# Altium PCB 4351 with 晶振.PcbDoc
Units mil, origin at the board's own origin, x right, y up, seen from the top; angles counter-clockwise.
Board outline 2051.03 x 1869.03 mil, 2 copper layers (Top Layer, Bottom Layer); 59 components, 33 nets, 165 pads, 212 vias.
Unrouted connection lines stored in the file: 2.
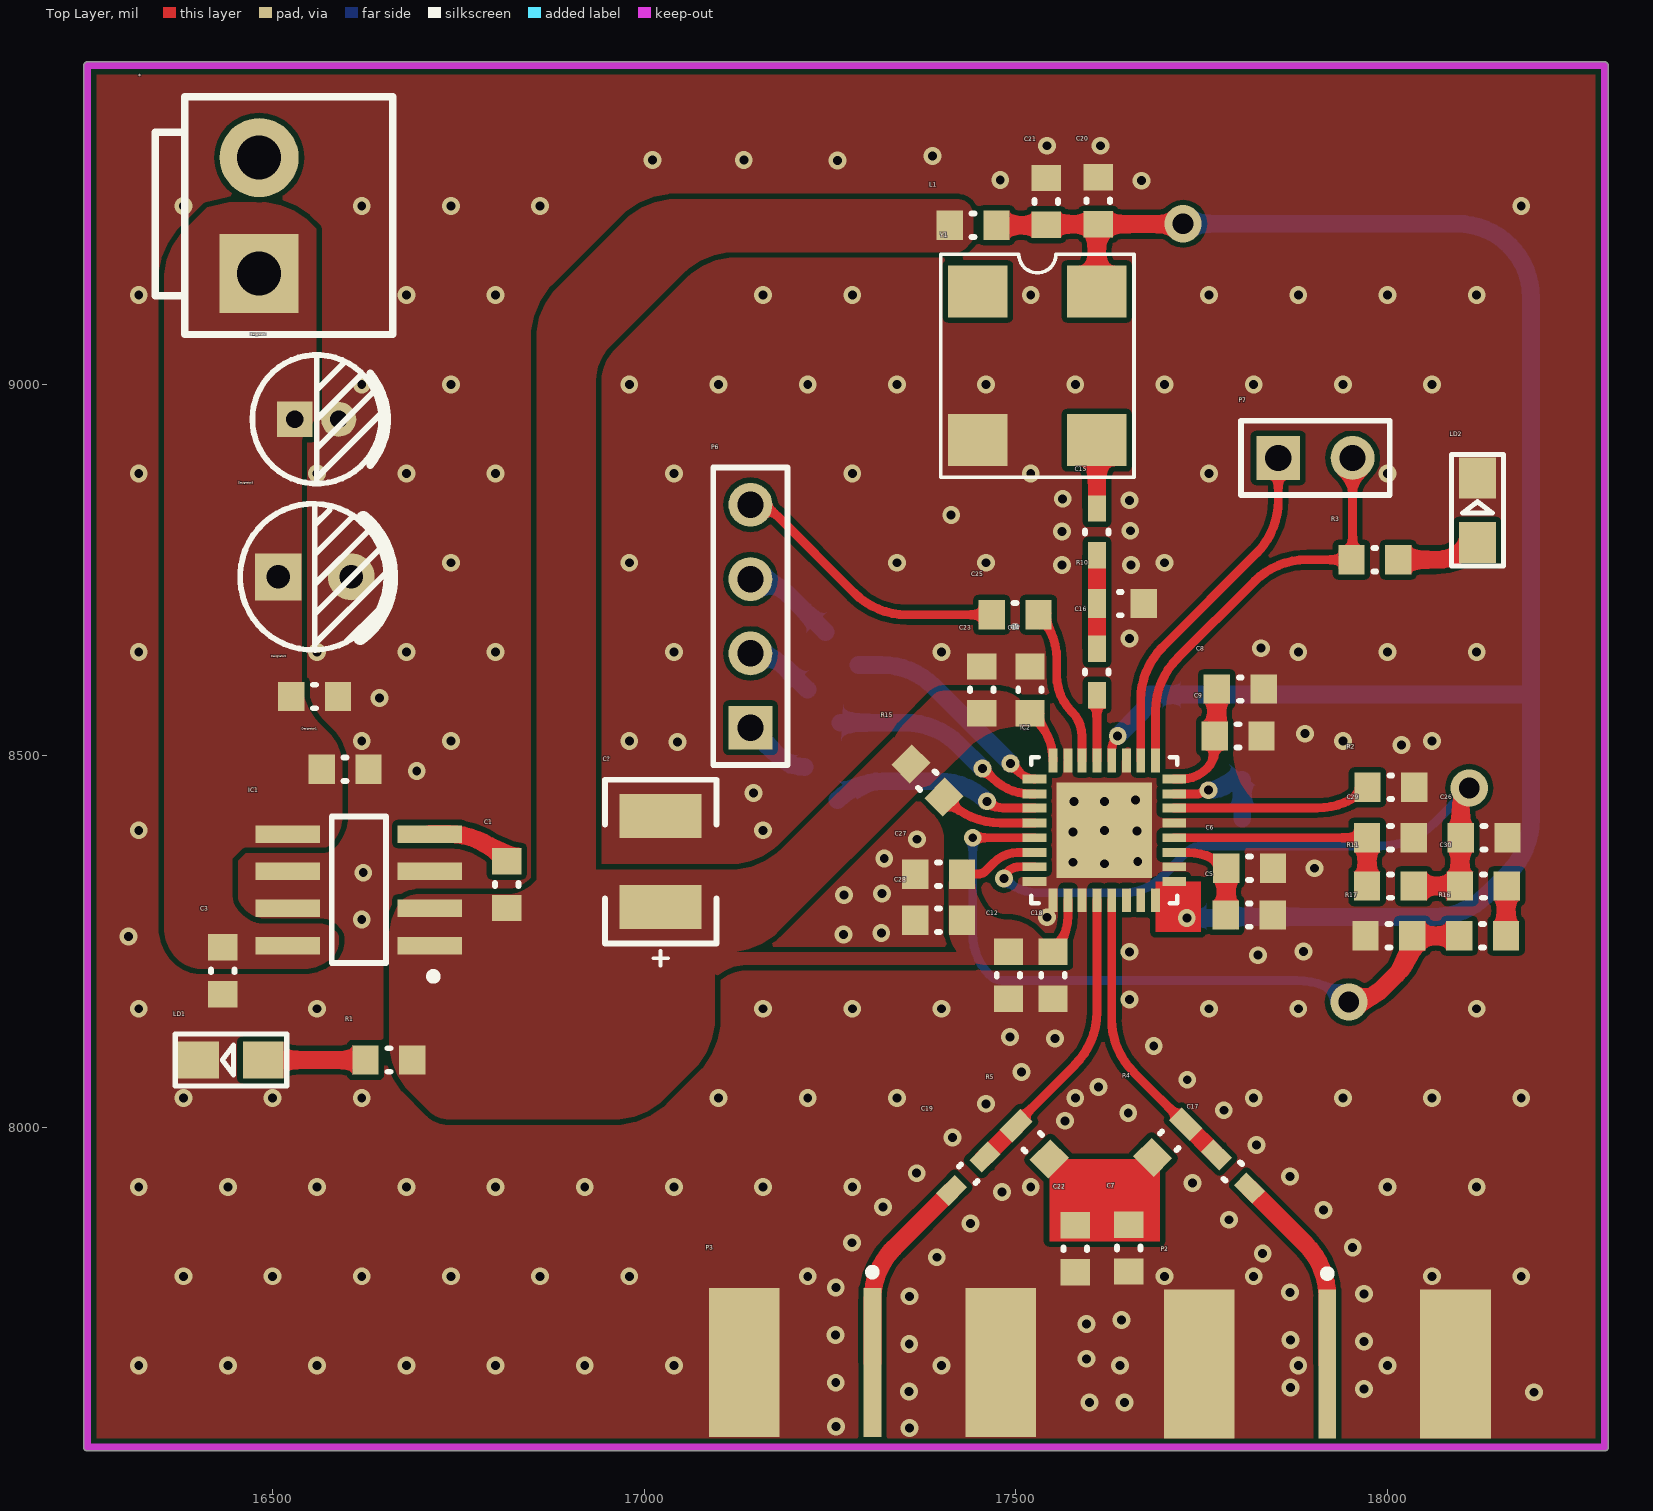
[diagram p0: Top Layer view]
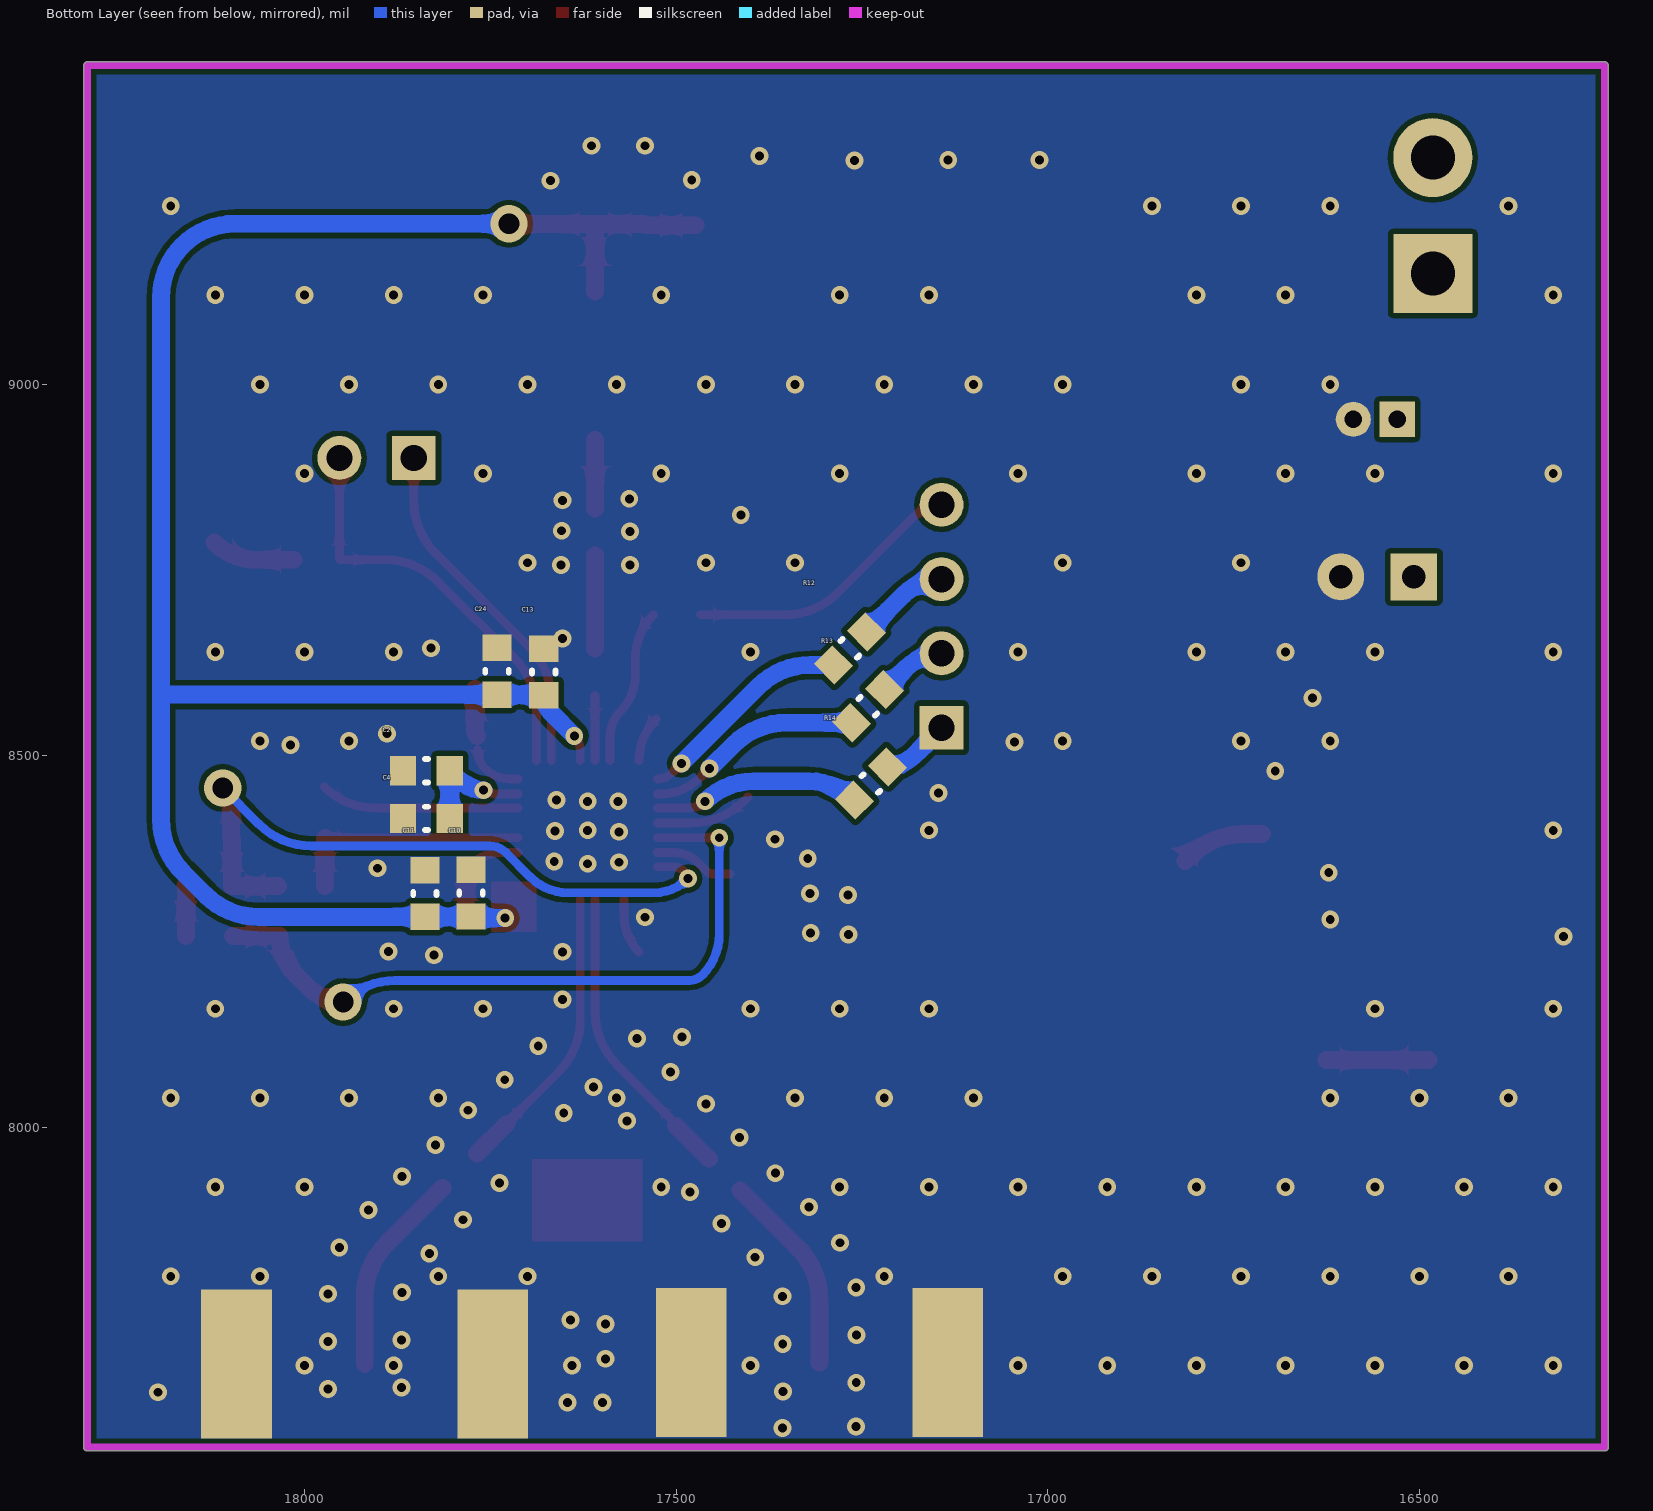
[diagram p1: Bottom Layer view, seen from below]

## Layer stack, top to bottom
Top Solder: solder mask 0.4, Solder Resist, Dk 3.5
Top Layer: signal copper 1.4
Dielectric 1: dielectric 12.6, FR-4, Dk 4.8
Bottom Layer: signal copper 1.4
Bottom Solder: solder mask 0.4, Solder Resist, Dk 3.5

## Board outline
16245.99,7570 ccw(c16251,7570) 16251,7564.98 18292,7564.98 ccw(c18292,7570) 18297.01,7570 18297.01,9429 ccw(c18292,9429) 18292,9434.01 16251,9434.01 ccw(c16251,9429) 16245.99,9429

## Design rules (kind name [scope] priority, off if disabled: settings)
Clearance [All] p1: gap=5 ignorepadtopadclearanceinfootprint=FALSE except(2: SMDPad-SMDPad; 7: Arc-Fill Arc-Poly Arc-Region Track-Fill Track-Poly Track-Region SMDPad-Fill SMDPad-Poly SMDPad-Region THPad-Fill THPad-Poly THPad-Region Via-Fill Via-Poly Via-Region Fill-Fill Fill-Poly Fill-Region Poly-Poly Poly-Region Region-Region)
PlaneConnect [All] p1: planeconnectstyle=Direct reliefexpansion=20 reliefentries=4 reliefconductorwidth=10 reliefairgap=10
PolygonConnect [All] p1: connectstyle=Direct reliefconductorwidth=10 reliefentries=4 polygonreliefangle="90 Angle" airgapwidth=10
RoutingVias [All] p1: holewidth=12 width=24 viastyle="Through Hole" minholewidth=12 minwidth=24 maxholewidth=12 maxwidth=24
SolderMaskExpansion [All] p1: expansion=4
Width [All] p1: maxlimit=24 minlimit=10 preferedwidth=12
29 further rules are at their usual default settings.

## Classes and differential pairs
component class ADF4351原理图(改): * C1 C2 C3 C4 C5 C6 C7 C8 C9 C10 C11 C12 C13 C14 C15 C16 C17 C18 C19 C20 C21 C22 C23 C24 C25 C26 C27 C28 C29 C30 C? IC1 IC2 L1 LD1 LD2 P2 P3 P6 P7 R1 R2 R3 R4 R5 R10 R11 R12 R13 R14 R15 R16 R17 Y1

## Components (designator, comment, footprint, x,y, rotation, side; value= is the part's Value field where it differs from the comment)
* "3.96" 3.96 16482,9227 r90 top
C1 "0.01uF" 0603C#1 16815,8327 r270 top
C2 "0.1uF" 0603C#1 17836,8480 r0 bottom
C3 "1uF" 0603C#1 16433,8211 r90 top
C4 "10pF" 0603C#1 17836,8416 r0 bottom
C5 "0.1uF" 0603C#1 17814,8286 r180 top
C6 "10pF" 0603C#1 17814.5,8349 r180 top
C7 "10pF" 0603C#1 17652,7838 r270 top
C8 "0.1uF" 0603C#1 17802,8590 r0 top
C9 "10pF" 0603C#1 17799,8527 r0 top
C10 "10pF" 0603C#1 17776,8315.5 r90 bottom
C11 "0.1uF" 0603C#1 17838,8315 r90 bottom
C12 "0.1uF" 0603C#1 17490,8205 r270 top
C13 "0.1uF" 0603C#1 17678,8613 r90 bottom
C14 "10pF" 0603C#1 17519,8589 r90 top
C15 "1nF" 0603C#2 17609,8801.5 r90 top
C16 "1nF" 0603C#2 17609,8613 r90 top
C17 "100pF" 0603C#2 17792,7941 r315 top
C18 "10pF" 0603C#1 17550,8205 r270 top
C19 "100pF" 0603C#2 17436,7938 r225 top
C20 "0.1uF" 0603C#1 17611,9247 r90 top
C21 "10pF" 0603C#1 17541,9246 r90 top
C22 "0.1uF" 0603C#1 17580,7837 r270 top
C23 "0.1uF" 0603C#1 17454,8589 r90 top
C24 "10pF" 0603C#1 17741,8614 r90 bottom
C25 "10pF" 0603C#1 17499,8690 r0 top
C26 "2.7nF" 0603C#1 18130,8390 r0 top
C27 "0.1uF" 0603C#1 17396,8341 r180 top
C28 "10pF" 0603C#1 17396,8279 r180 top
C29 "680pF" 0603C#1 18004,8390 r0 top
C30 "4.7nF" 0603C#1 18129,8325 r180 top
C? "10uf" TAN-B 17022,8358 r270 top value=10uF
Designator1 "Comment" 0603C#1 16597.5,8482 r0 top
Designator2 "Comment" 0603C#1 16556.5,8580 r0 top
Designator3 "Comment" "CAP 2.5*5*11 - BK" 16556.79,8741 r0 top
Designator4 "Comment" "CAP 1.5*4*8" 16559.47,8953 r0 top
IC1 "LTC1763" SOIC8_1R27_4R9X6 16616,8320 r180 top
IC2 "ADF4351" QFN50P500X500X100-33N 17619,8400 r0 top
L1 "470uH" 0603C#1 17442.5,9214 r0 top value=100uH
LD1 "LED" SMDLED 16487.54,8090.94 r180 top
LD2 "LED" SMDLED 18120.94,8786.97 r90 top
P2 "SMA" SMA 17924,7778 r90 top
P3 "SMA" SMA 17312,7780 r90 top
P6 "Header 4" HDR1X4 17143,8538 r90 top
P7 "Header 2" HDR1X2 17853,8901 r0 top
R1 "1K" 0603R#1 16656.5,8091 r0 top
R2 "4K7" 0603R#1 18004.5,8458 r0 top
R3 "1K" 0603R#1 17983,8764 r180 top
R4 "50R" 0603R#2 17706.27,7982.27 r225 top
R5 "50R" 0603R#2 17522.73,7980.27 r315 top
R10 "50R" 0603R#3 17640.5,8705 r180 top
R11 "1K" 0603R#1 18004,8325 r0 top
R12 "10K" 0603R#1 17266.27,8644.73 r315 bottom
R13 "10K" 0603R#1 17242,8567 r135 bottom
R14 "10K" 0603R#1 17238,8463 r315 bottom
R15 "10K" 0603R#1 17381,8467 r315 top
R16 "330R" 0603R#1 18128,8258 r180 top
R17 "1K" 0603R#1 18002,8258 r180 top
Y1 "" XTAL-OCX7050 17449,9125 r0 top

## Footprints (in the part's own frame and the unit in brackets; to place one, negate y for a bottom-side part, rotate by r counter-clockwise, add the part's x,y. Pads: shape width x height; smd on the part's side, far side on the other; paste and mask are expansions set on the pad)
3.96 [mm] "接插件，25V/5A"
  rect 2.7x2.7 hole 1.5: 1(-1.98,0)
  round 2.7 hole 1.5: 2(1.982,0)
  silkscreen extent -4.06,-4.57 4.07,3.56, body extent -3.98,-4.4 4.03,4.16, height 10.5
0603C#1 [mm] "Chip Capacitor, Body 1.6x0.8mm, Height 1.0mm, IPC Medium Density"
  rect 0.9x1 smd: 1(-0.8,0) 2(0.8,0)
  silkscreen extent -0.05,-0.4 0.05,0.4, body extent -0.88,-0.48 0.88,0.48, height 1
0603C#2 [mm] "Chip Capacitor, Body 1.6x0.8mm, Height 1.0mm, IPC Medium Density"
  rect 0.9x0.61 smd: 1(-0.8,0) 2(0.8,0)
  silkscreen extent -0.05,-0.4 0.05,0.4, body extent -0.87,-0.48 0.88,0.47, height 1
0603R#1 [mm] "Chip Resistor, Body 1.6x0.8mm, IPC Medium Density"
  rect 0.9x1 smd: 1(-0.8,0) 2(0.8,0)
  silkscreen extent -0.05,-0.4 0.05,0.4, body extent -0.85,-0.47 0.85,0.47, height 0.6
0603R#2 [mm] "Chip Resistor, Body 1.6x0.8mm, IPC Medium Density"
  rect 0.61x1 smd: 1(-0.8,0)
  rect 0.9x1 smd: 2(0.8,0)
  silkscreen extent -0.05,-0.4 0.05,0.4, body extent -0.85,-0.47 0.85,0.47, height 0.6
0603R#3 [mm] "Chip Resistor, Body 1.6x0.8mm, IPC Medium Density"
  rect 0.9x1 smd: 1(-0.8,0)
  rect 0.61x1 smd: 2(0.8,0)
  silkscreen extent -0.05,-0.4 0.05,0.4, body extent -0.85,-0.47 0.85,0.47, height 0.6
"CAP 1.5*4*8" [mm] "脚距1.5mm直径4mm高度8mm"
  rect 1.2x1.2 hole 0.6: 1(-0.75,0)
  round 1.2 hole 0.6: 2(0.75,0)
  silkscreen extent -2.2,-2.2 2.41,2.2, body extent -2,-2 2.02,2, height 8.04
"CAP 2.5*5*11 - BK" [mm] "脚距2.5mm直径5mm高度11mm"
  rect 1.6x1.6 hole 0.8: 1(-1.25,0)
  round 1.6 hole 0.8: 2(1.25,0)
  silkscreen extent -2.55,-2.5 2.6,2.5, body extent -2.5,-2.5 2.51,2.5, height 11.04
HDR1X2 [mm] "Connector; Header; 2 Position"
  rect 1.5x1.5 hole 0.9: 1(0,0)
  round 1.5 hole 0.9: 2(2.54,0)
  silkscreen extent -1.27,-1.27 3.81,1.27
HDR1X4 [mm] "Connector; Header; 4 Position"
  rect 1.5x1.5 hole 0.9: 1(0,0)
  round 1.5 hole 0.9: 2(2.54,0) 3(5.08,0) 4(7.62,0)
  silkscreen extent -1.27,-1.27 8.89,1.27
QFN50P500X500X100-33N [mil]
  rect 32x12 smd: 1(-94,69) 2(-94,49) 3(-94,30) 4(-94,10) 5(-94,-10) 6(-94,-30) 7(-94,-49) 8(-94,-69) 17(94,-69) 18(94,-49) 19(94,-30) 20(94,-10) 21(94,10) 22(94,30) 23(94,49) 24(94,69)
  rect 12x32 smd: 9(-69,-94) 10(-49,-94) 11(-30,-94) 12(-10,-94) 13(10,-94) 14(30,-94) 15(49,-94) 16(69,-94) 25(69,94) 26(49,94) 27(30,94) 28(10,94) 29(-10,94) 30(-30,94) 31(-49,94) 32(-69,94)
  rect 128x128 smd: 33(0,0)
  silkscreen extent -98,-98 98,98
SMA [mil]
  rect 200x24 smd: 1(-96,5)
  rect 200x95 smd: 2(-96,177.5) 2(-96,-167.5)
  rect 200x95 smd far side: 2(-96,177.5) 2(-96,-167.5)
  silkscreen extent 21,0 31,10, body extent -571,-183 -9,192, height 171
SMDLED [mm]
  rect 1.4x1.27 smd: 1(0.001,-0.002) 2(2.211,-0.002)
  silkscreen extent -0.8,-0.89 3.01,0.89
SOIC8_1R27_4R9X6 [mm] "1.2 A current limited high-side power switch with thermal shutdown"
  rect 2.2x0.6 smd: 1(-2.425,1.905) 2(-2.425,0.635) 3(-2.425,-0.635) 4(-2.425,-1.905) 5(2.425,-1.905) 6(2.425,-0.635) 7(2.425,0.635) 8(2.425,1.905)
  silkscreen extent -2.68,-2.5 0.93,3.08, body extent -2,-2.5 2,2.5, height 1.45
TAN-B [mm] "Tan Capacitor"
  rect 1.5x2.8 smd: 1(1.55,0) 2(-1.55,0)
  silkscreen extent -2.79,-1.9 3.56,1.91, body extent -1.76,-1.54 1.7,1.54, height 1
XTAL-OCX7050 [mil]
  rect 80x70 smd: 1(0,0) 2(0,-200) 3(160,-200) 4(160,0)
  silkscreen extent -50,-250 210,50

## Part data
C1 C2 C3 C4 C5 C6 C7 C8 C9 C10 C11 C12 C13 C14 C15 C16 C17 C18 C19 C20 C21 C22 C23 C24 C25 C26 C27 C28 C29 C30: library part C, "Capacitor"
C?: library part "C Pol1", "Polarized Capacitor (Radial)", Published=8-Jun-2000, Publisher="Altium Limited", Revision="July-2002: Re-released for DXP Platform."
IC1: library part LTC1763CS8-3.3#TRPBF, "Integrated Circuit", Manufacturer_Name="Analog Devices", Arrow Part Number=LTC1763CS8-3.3#TRPBF, Datasheet Link=https://datasheet.lcsc.com/szlcsc/2004261932_Analog-Devices-ADI-LTC1763CS8-3-3-TRPBF_C515997.pdf, Height=1.752mm, Manufacturer_Part_Number=LTC1763CS8-3.3#TRPBF
IC2: library part ADF4351BCPZ, "Integrated Circuit", Manufacturer_Name="Analog Devices", Mouser2 Part Number=584-ADF4351BCPZ, Datasheet Link=https://componentsearchengine.com//ADF4351BCPZ.pdf, Manufacturer_Part_Number=ADF4351BCPZ, Mouser2 Price/Stock=https://www.mouser.com/Search/Refine.aspx?Keyword=584-ADF4351BCPZ
L1: library part Inductor, "Inductor", Published=8-Jun-2000, Publisher="Altium Limited", Revision="July-2002: Re-released for DXP Platform."
LD1 LD2: "Typical RED, GREEN, YELLOW, AMBER GaAs LED", PackageDocument=Feb-2002, LatestRevisionDate=17-Jul-2002, LatestRevisionNote="Re-released for DXP Platform.", PackageReference=3.2X1.6X1.1, Published=8-Jun-2000, Publisher="Altium Limited"
P2 P3: "SMA Connector"
P6: "Header, 4-Pin", LatestRevisionDate=17-Jul-2002, LatestRevisionNote="Re-released for DXP Platform.", Publisher="Altium Limited"
P7: "Header, 2-Pin", LatestRevisionDate=17-Jul-2002, LatestRevisionNote="Re-released for DXP Platform.", Publisher="Altium Limited"
R1 R2 R3 R4 R5 R10 R11 R12 R13 R14 R15 R16 R17: library part Resistor, "Resistor"
Y1: library part XTAL-SPXO, "Simple Package Xtal Oscillator"

## Via types
v1: diameter 24, hole 12, Top Layer to Bottom Layer, tented both sides, 199 vias
v2: diameter 24, hole 12, Top Layer to Bottom Layer, 10 vias
v3: diameter 50, hole 28, Top Layer to Bottom Layer, tented both sides, 3 vias

## Nets (pads, with @x,y where several pads share a name; then routed paths per layer and width w, separated by ;. In a path a pad name is that pad's centre, name@x,y a point inside that pad or via, vN(x,y) a via of type N, cw(c..) or ccw(c..) an arc to the next point about the centre after c; other vN are vias at no path point)
+3.3: C1.2 C7.1 C10.1 C11.1 C12.1 C13.1 C14.1 C18.1 C20.1 C21.1 C22.1 C23.1 C24.1 C27.1 C28.1 C?.1 IC1.1 IC1.2 IC2.6 IC2.10 IC2.16 IC2.17 IC2.28 IC2.32 L1.1 L1.2 R1.2 R4.2 R5.2 R15.1 Y1.4 | length 2967.2
  Top Layer w12: C27.1 17448.34,8341 ccw(c17448.34,8357.07) 17459.71,8345.71 17471,8357 cw(c17502.38,8325.62) 17502.38,8370 IC2.6 ; C14.1@17527.02,8549.49 cw(c17471.53,8494) IC2.32 ; C18.1 ccw(c17501.72,8284.78) 17570,8284.78 IC2.10 ; IC2.28 17629,8507.69 cw(c17656.31,8507.69) v1(17637,8527)
  Top Layer w24: L1.2 17539.78,9214 ccw(c17539.78,9215.72) C21.1 cw(c17543.41,9212.09) 17543.41,9215.5 C20.1 ; Y1.4 17609,9210.68 cw(c17615.83,9210.68) C20.1 ; v3(17725,9216) cw(c17723.8,9217.2) 17723.8,9215.5 C20.1
  Bottom Layer w24: v1(17637,8527) 17668.45,8558.45 ccw(c17645.4,8581.5) C13.1 cw(c17680.41,8579.09) 17680.41,8582.5 C24.1 18191.78,8582.5 cw(c18191.78,8580.78) 18193,8582 ; v3(17725,9216) 18093.58,9216 cw(c18093.58,9116) 18164.29,9186.71 cw(c18094.98,9117.4) 18193,9117.4 18193,8582 ; v1(17730,8282) 17771.17,8282 ccw(c17771.17,8288.83) C10.1 ccw(c17777.2,8285.2) 17777.2,8283.5 C11.1 18062.08,8283.5 ccw(c18062.08,8383.5) 18132.79,8312.79 18163.71,8343.71 ccw(c18093,8414.42) 18193,8414.42 18193,8582
+12: *.1 C3.2 Designator1.1 Designator2.1 Designator3.1 Designator4.1 IC1.5 IC1.8
GND: C2.2 C3.1 C4.2 C5.1 C6.1 C7.2 C8.2 C9.2 C10.2 C11.2 C12.2 C13.2 C14.2 C18.2 C20.2 C21.2 C22.2 C23.2 C24.2 C26.2 C27.2 C28.2 C29.2 C?.2 Designator1.2 Designator2.2 Designator3.2 Designator4.2 IC1.3 IC1.6 IC1.7 IC2.8 IC2.9 IC2.11 IC2.18 IC2.21 IC2.27 IC2.31 IC2.33 LD1.2 LD2.2 P2.2 P3.2 R2.2 R10.1 R17.2 Y1.2
  other v1: 17357,7596 17258,7598 17599,7630 17646,7630 18197,7644 17356.32,7645.08 17968.32,7648.42 17869.68,7650.47 17257.68,7656.88 16320,7680 16440,7680 16560,7680 16680,7680 16800,7680 16920,7680 17040,7680 17400,7680 17640,7680 17880,7680 18000,7680 17595,7689 17356.55,7709.08 17968.55,7712.42 17869.45,7714.47 17257.45,7720.88 17595,7736 17642,7741 17357.12,7773.08 17968.48,7776.42 17868.84,7778.47 17257.8,7784.88 16380,7800 16500,7800 16620,7800 16740,7800 16860,7800 16980,7800 17220,7800 17700,7800 17820,7800 18060,7800 18180,7800 17393.69,7825.61 17832.07,7830.85 17953.18,7838.56 17279.4,7845.13 17438.94,7870.86 17786.82,7876.1 17913.95,7889.13 17321.36,7893.44 17481.38,7913.63 16320,7920 16440,7920 16560,7920 16680,7920 16800,7920 16920,7920 17040,7920 17160,7920 17280,7920 17520,7920 18000,7920 18120,7920 17737.68,7925.57 17868.69,7934.39 17366.62,7938.7 17823.55,7976.71 17414.86,7986.61 17566.16,8009.19 17651.28,8019.85 17779.77,8023.4 17459.91,8032.07 16380,8040 16500,8040 16620,8040 17100,8040 17220,8040 17340,8040 17580,8040 17820,8040 17940,8040 18060,8040 18180,8040 17611.32,8054.54 17730.64,8064.41 17507.69,8074.65 17685.58,8109.86 17552.72,8120.13 17492,8122 16320,8160 16560,8160 17160,8160 17280,8160 17400,8160 17760,8160 17880,8160 18120,8160 17652.81,8172.57 17826,8232 17652.81,8236.57 17887,8237 16306,8257 17268,8260 17319,8262 16620,8280 17542,8283 17269,8313 17320,8315 17902,8349 17323,8362 17367,8388 16320,8400 17160,8400 17147,8450 16694,8480 18019,8515 17045,8519 16620,8520 16740,8520 16980,8520 17940,8520 18060,8520 17889,8530 16644,8578 16320,8640 16560,8640 16680,8640 16800,8640 17040,8640 17400,8640 17880,8640 18000,8640 18120,8640 17830,8645 17653,8658 17562,8757 17655,8757 16740,8760 16980,8760 17340,8760 17460,8760 17700,8760 17562,8802 17654,8803 17413,8824 17653,8844 17563,8846 16320,8880 16560,8880 16680,8880 16800,8880 17040,8880 17280,8880 17520,8880 17760,8880 18000,8880 16620,9000 16740,9000 16980,9000 17100,9000 17220,9000 17340,9000 17460,9000 17580,9000 17700,9000 17820,9000 17940,9000 18060,9000 16320,9120 16680,9120 16800,9120 17160,9120 17280,9120 17520,9120 17760,9120 17880,9120 18000,9120 18120,9120 16380,9240 16620,9240 16740,9240 16860,9240 18180,9240 17669,9274 17479,9275 17260,9301 17011,9302 17134,9302 17388,9307 17542,9321 17614,9321
  other v2: 16622,8343 17619,8355 17577,8357 17664,8358 17577,8398 17663,8399 17619,8400 17578,8439 17619,8439 17661,8441
in: C16.1 IC2.29 | length 87.5
  Top Layer w12: IC2.29 C16.1
NetC1_1: C1.1 IC1.4 | length 114.3
  Top Layer w24: IC1.4 16737.07,8395 cw(c16737.07,8295) 16807.79,8365.71 C1.1
NetC2_1: C2.1 C4.1 IC2.23 | length 136.4
  Top Layer w12: IC2.23 17743.76,8449 ccw(c17743.76,8459.24) 17751,8452 17753,8454 v1(17759,8454)
  Bottom Layer w24: v1(17759,8454) ccw(c17759,8501.09) C2.1@17792.3,8467.79 ; C4.1 C2.1@17804.5,8467.79
NetC5_2: C5.2 C6.2 IC2.19 | length 138.7
  Top Layer w12: IC2.19 17732.3,8370 cw(c17732.3,8298.3) C6.2
  Top Layer w24: C5.2 ccw(c17781.31,8287.2) 17783,8287.2 C6.2
NetC8_1: C8.1 C9.1 IC2.24 | length 139.7
  Top Layer w12: IC2.24 17723.2,8469 ccw(c17723.2,8516.8) 17757,8483 ccw(c17731.64,8508.36) C9.1@17767.5,8508.36
  Top Layer w24: C9.1 ccw(c17760.26,8534.24) 17770.5,8534.24 C8.1
NetC15_1: C15.1 C16.2 R10.2 | length 125.5
  Top Layer w24: C16.2 R10.2 C15.1
NetC15_2: C15.2 Y1.3 | length 92
  Top Layer w24: C15.2 Y1.3
NetC17_1: C17.1 IC2.13 R4.1 | length 394.2
  Top Layer w12: IC2.13 17629,8145.51 ccw(c17729,8145.51) 17658.29,8074.79 R4.1
  Top Layer w24: R4.1 C17.1@17768.02,7965.06
NetC17_2: C17.2 P2.1 | length 275.8
  Top Layer w24: C17.2 17889.71,7843.29 cw(c17819,7772.58) 17919,7772.58 P2.1
NetC19_1: C19.1 IC2.12 R5.1 | length 406.7
  Top Layer w12: R5.1 cw(c17507.5,8002.54) 17502.51,8007.51 17579.71,8084.71 ccw(c17509,8155.42) 17609,8155.42 IC2.12
  Top Layer w24: C19.1@17456.04,7958.12 R5.1
NetC19_2: C19.2 P3.1 | length 271.6
  Top Layer w24: P3.1 17307,7767.58 cw(c17407,7767.58) 17328.4,7829.4 cw(c17407,7767.58) 17336.29,7838.29 C19.2
NetC20_1: 
NetC25_1: C25.1 P6.4 | length 379.3
  Top Layer w12: P6.4 cw(c17143,8787.3) 17178.85,8823.15 17282.71,8719.29 ccw(c17353.42,8790) 17353.42,8690 C25.1
NetC25_2: C25.2 IC2.30 | length 211.6
  Top Layer w12: C25.2 cw(c17471.34,8630.84) 17555,8630.84 17555,8608.28 ccw(c17623.28,8608.28) 17575,8560 cw(c17541.2,8526.2) 17589,8526.2 IC2.30
NetC26_1: C26.1 C30.2 IC2.7 R11.2 | length 927.2
  Top Layer w12: v1(17484,8335) 17484,8339 17490,8345 cw(c17504.49,8330.51) 17504.49,8351 IC2.7
  Top Layer w24: R11.2 C30.2 18097.5,8387.59 cw(c18100.92,8387.59) C26.1 18098.5,8429.25 cw(c18137.75,8429.25) v3(18110,8457)
  Bottom Layer w12: v1(17484,8335) ccw(c17529.87,8380.87) 17529.87,8316 17645.3,8316 ccw(c17645.3,8387.7) 17696,8337 17728.95,8369.95 cw(c17750.8,8348.09) 17750.8,8379 17990.58,8379 ccw(c17990.58,8479) 18061.29,8408.29 v3(18110,8457)
NetC30_1: C30.1 R16.1 | length 67.3
  Top Layer w24: R16.1 18159.5,8322.59 cw(c18162.91,8322.59) C30.1
NetIC2_1: IC2.1 R12.2 | length 294.6
  Top Layer w12: v1(17493,8490) 17506.22,8476.78 ccw(c17525,8495.56) IC2.1
  Bottom Layer w24: R12.2 17319.12,8622.46 cw(c17319.12,8522.46) 17389.83,8593.17 v1(17493,8490)
NetIC2_2: IC2.2 R13.1 | length 293
  Top Layer w12: v1(17455,8483) 17456,8483 17469,8470 ccw(c17519.7,8520.7) 17519.7,8449 IC2.2
  Bottom Layer w24: R13.1 17351.85,8544.73 cw(c17351.85,8444.73) 17422.56,8515.44 v1(17455,8483)
NetIC2_3: IC2.3 R14.2 | length 281.1
  Top Layer w12: v1(17461,8439) ccw(c17482.73,8460.73) 17462.2,8437.86 ccw(c17482.73,8460.73) 17482.73,8430 IC2.3
  Bottom Layer w24: R14.2 cw(c17321.28,8379.72) 17321.28,8466 17395.82,8466 cw(c17395.82,8373.82) v1(17461,8439)
NetIC2_4: IC2.4 R15.2 | length 131.8
  Top Layer w12: R15.2 17408.71,8439.29 ccw(c17479.42,8510) 17479.42,8410 IC2.4
NetIC2_5: IC2.5 R16.2 R17.1 | length 964
  Top Layer w12: v1(17442,8390) IC2.5
  Top Layer w24: v3(17948,8169) ccw(c17948,8234.18) 17994.09,8188.09 18011.93,8205.93 ccw(c17959.85,8258) R17.1 R16.2
  Bottom Layer w12: v1(17442,8390) 17442,8260.53 ccw(c17520.53,8260.53) 17465,8205 ccw(c17481.9,8221.9) 17481.9,8198 17877.99,8198 cw(c17877.99,8098.99) v3(17948,8169)
NetIC2_22: IC2.22 R2.1 | length 267.5
  Top Layer w12: IC2.22 17905.41,8430 ccw(c17905.41,8525.6) R2.1
NetIC2_25: IC2.25 P7.2 R3.2 | length 567.4
  Top Layer w12: IC2.25 17688,8560.58 cw(c17788,8560.58) 17717.29,8631.29 17820.71,8734.71 cw(c17891.42,8664) 17891.42,8764 R3.2 ccw(c17947.89,8767.61) 17953,8767.61 P7.2
NetIC2_26: IC2.26 P7.1 | length 475
  Top Layer w12: IC2.26 17668,8575.58 cw(c17768,8575.58) 17697.29,8646.29 17823.71,8772.71 ccw(c17753,8843.42) 17837.84,8790.49 ccw(c17753,8843.42) 17853,8843.42 P7.1
NetLabel9: C29.1 IC2.20 R11.1 | length 324.5
  Top Layer w12: IC2.20 C29.1
  Top Layer w24: R11.1 C29.1
NetLD1_1: LD1.1 R1.1 | length 137.5
  Top Layer w24: LD1.1 R1.1
NetLD2_1: LD2.1 R3.1 | length 112.7
  Top Layer w24: R3.1 18065.47,8764 ccw(c18065.47,8842.53) LD2.1
new1: P6.3 R12.1 | length 127.3
  Bottom Layer w24: P6.3 cw(c17143,8665.57) 17194.21,8716.79 R12.1
new2: P6.2 R13.2 | length 94
  Bottom Layer w24: P6.2 cw(c17143,8570.4) 17190.8,8618.2 R13.2
new3: P6.1 R14.1 | length 92.5
  Bottom Layer w24: P6.1 17181.59,8499.41 ccw(c17215.73,8533.56) R14.1
pads on no net: *.2 IC2.14 IC2.15 Y1.1

## Polygon pours and split planes (outlines as drawn)
+12 on Top Layer "Top Layer-No Net" (solid, pour order 0): 16425,8701 ccw(c16425,8645.47) 16385.74,8684.74 16377,8676 ccw(c16432.53,8620.47) 16354,8620.47 16354,8270.46 ccw(c16415.46,8270.46) 16372,8227 ccw(c16403.38,8258.38) 16403.38,8214 16542.37,8214 ccw(c16542.37,8268.63) 16581,8230 ccw(c16561.69,8249.31) 16589,8249.31 16589,8257 ccw(c16581.76,8257) 16586.88,8262.12 16582,8267 ccw(c16565.1,8250.1) 16565.1,8274 16490,8274 cw(c16490,8317.46) 16459.27,8286.73 16454,8292 cw(c16473.31,8311.31) 16446,8311.31 16446,8362 16458.17,8374.17 cw(c16465,8367.34) 16465,8377 16568.34,8377 ccw(c16568.34,8390.66) 16578,8381 ccw(c16539.37,8419.63) 16594,8419.63 16594,8485 ccw(c16526.4,8485) 16574.2,8532.8 16563,8544 cw(c16620.94,8601.94) 16539,8601.94 16539,8629.99 ccw(c16439.99,8629.99) 16510,8700
+3.3 on Top Layer "Top Layer-No Net" (solid, pour order 2): 16683,8317 ccw(c16745.77,8254.23) 16657,8254.23 16657,8117.42 ccw(c16757,8117.42) 16686.29,8046.71 16711,8022 ccw(c16737.56,8048.56) 16737.56,8011 16957.58,8011 ccw(c16957.58,8111) 17028.29,8040.29 17065.71,8077.71 ccw(c16995,8148.42) 17095,8148.42 17095,8267 ccw(c17027.4,8267) 17075.2,8314.8 17052,8338 ccw(c17030.27,8316.27) 17030.27,8347 16894.46,8347 ccw(c16894.46,8285.54) 16851,8329 cw(c16814.79,8365.21) 16814.79,8314 16696.14,8314 ccw(c16696.14,8279.86) 16672,8304
+3.3 on Top Layer "Top Layer-No Net" (solid, pour order 12): 17410,8331 17410,8267.8 ccw(c17457.8,8267.8) 17424,8234 ccw(c17460.21,8270.21) 17460.21,8219 17539.59,8219 ccw(c17539.59,8222.41) 17542,8220 cw(c17554.07,8232.07) 17537,8232.07 17537,8254 17526.56,8264.44 ccw(c17489,8226.89) 17489,8280 17486.14,8280 cw(c17486.14,8314.14) 17462,8290 cw(c17503.04,8331.04) 17445,8331.04 17445,8332
+3.3 on Top Layer "Top Layer-No Net" (solid, pour order 14): 17349.38,8542.38 ccw(c17393.77,8498) 17331,8498 ccw(c17374.46,8498) 17343.73,8467.27 17350,8461 ccw(c17359.66,8470.66) 17359.66,8457 17368,8457 ccw(c17368,8490.8) 17391.9,8466.9 17435.71,8510.71 cw(c17506.42,8440) 17506.42,8540 17508,8540 17508,8570.17 ccw(c17501.17,8570.17) 17506,8575 ccw(c17474.62,8543.62) 17474.62,8588 17404,8588 ccw(c17404,8566.27) 17388.64,8581.64
+3.3 on Top Layer "Top Layer-No Net" (solid, pour order 16): 17338.45,8528.19 17186.55,8376.29 cw(c17115.84,8447) 17115.84,8347 17033.3,8347 ccw(c17087.2,8347) 17049.08,8308.89 17095,8262.97 ccw(c17097.41,8260.56) 17094,8260.56 17094,8236 17111.02,8236 ccw(c17111.02,8336) 17181.73,8265.29 17373.97,8457.52
+3.3 on Top Layer "Top Layer-No Net" (solid, pour order 18): 17420.67,8237.33 cw(c17417.46,8240.54) 17417.46,8236 17094,8236 17094,8202.41 cw(c17090.59,8202.41) 17093,8200 cw(c17138.87,8154.13) 17138.87,8219 17455.17,8219
+3.3 on Top Layer "Top Layer-No Net" (solid, pour order 20): 16855.28,8333.28 16855.28,9060.86 cw(c16955.28,9060.86) 16884.57,9131.57 16972.71,9219.71 cw(c17043.42,9149) 17043.42,9249 17421.51,9249 cw(c17421.51,9228.51) 17436,9243 cw(c17419.1,9226.1) 17443,9226.1 17443,9201 cw(c17426.1,9201) 17438.05,9189.05 17431,9182 cw(c17421.34,9191.66) 17421.34,9178 17122.42,9178 ccw(c17122.42,9078) 17051.71,9148.71 16954,9051 ccw(c16999.87,9005.13) 16935,9005.13 16935,8263
+12 on Top Layer "Top Layer-No Net" (solid, pour order 22): 16412,9238 16383.29,9209.29 ccw(c16454,9138.58) 16354,9138.58 16354,8504.72 16358.19,8504.72 ccw(c16358.19,8604.72) 16428.9,8534.01 16538.28,8643.38 ccw(c16536.53,8645.13) 16539,8645.13 16539,8921.51 cw(c16559.49,8921.51) 16545,8936 ccw(c16511.2,8969.8) 16559,8969.8 16559,9209 16552.29,9215.71 ccw(c16481.58,9145) 16481.58,9245 16441,9245
GND on Top Layer "Top Layer-No Net" (solid, pour order 24): 16251,9429 18292,9429 18292,7570 16251,7570
GND on Bottom Layer "Top Layer-No Net" (solid, pour order 26): 16251,9429 18292,9429 18292,7570 16251,7570

## Keep-outs
Keep-Out Layer:
  lines w10: 16251,7570 16251,9429 18292,9429 18292,7570 16251,7570

## Other copper
Top Layer:
  rectangle net +3.3: 17688,8263 17749,8331
  rectangle net +3.3: 17545,7847 17694,7958
  pour cut-out: 17479.47,8528.83 cw(c17476.82,8531.48) 17476.82,8527.73 17458.59,8527.73 cw(c17448.38,8527.73) 17455.6,8520.51 17420.21,8485.11 cw(c17402.98,8502.35) 17402.98,8477.98 cw(c17402.98,8465.96) 17411.47,8474.46 17433.23,8452.7 17433,8452.46 17433,8437 17436.76,8437 cw(c17436.76,8426.76) 17444,8434 17464.29,8454.29 cw(c17466,8452.59) 17466,8455 17471.35,8455 ccw(c17471.35,8547.65) 17536.86,8482.14 17537.95,8483.23 ccw(c17528.18,8493) 17542,8493 ccw(c17486.47,8493) 17525.74,8532.26 17523,8535 ccw(c17515.73,8527.73) 17515.73,8538.01 17489.05,8538.01
  pour cut-out: 17391,8419 17410.61,8419 cw(c17410.61,8416.92) 17412.08,8418.39 cw(c17412.08,8403.06) 17422.92,8413.9 17427.59,8409.23 cw(c17419.35,8401) 17431,8401 17431,8383.41 ccw(c17434.41,8383.41) 17432,8381 cw(c17428.36,8377.36) 17433.51,8377.36 17433.51,8370.44 cw(c17429.81,8370.44) 17432.43,8367.82 cw(c17421.79,8378.46) 17421.79,8363.42 17403.19,8363.42 17403.19,8388.17 ccw(c17358.17,8388.17) 17390,8420
  pour cut-out: 17791.81,8504.58 cw(c17770.71,8525.68) 17770.71,8495.84 17758.75,8495.84 17758.75,8477.39 ccw(c17807.39,8477.39) 17773,8443 17817,8443 cw(c17877.8,8503.8) 17791.81,8503.8
  pour cut-out: 17791.81,8504.58 17779.86,8504.58 ccw(c17779.86,8474.74) 17758.75,8495.84 ccw(c17784.93,8522.02) 17784.93,8485 17788,8485

## Silkscreen, mask and mechanical layers (free items; w line width, h text height)
Top Paste:
  rectangle: 17556,7874 17678,7947
  rectangle: 16780,8060 16999,8204
Bottom Paste:
  rectangle: 16490,8189 16757,8440
  rectangle: 17547,8335 17683,8470
Top Solder:
  rectangle: 17556,7874 17678,7947
  rectangle: 16780,8060 16999,8204
Bottom Solder:
  rectangle: 16490,8189 16757,8440
  rectangle: 17547,8335 17683,8470